# Altium PCB barricelli.PcbDoc (part 2 of 5)
Units mm, origin at the board's own origin, x right, y up, seen from the top; angles counter-clockwise.
Board outline 153 x 153 mm, 8 copper layers (Top Layer, PWR, Mid-Layer 1, Mid-Layer 2, Mid-Layer 3, Mid-Layer 4, GND, Bottom Layer); 168 components, 427 nets, 1233 pads, 911 vias.
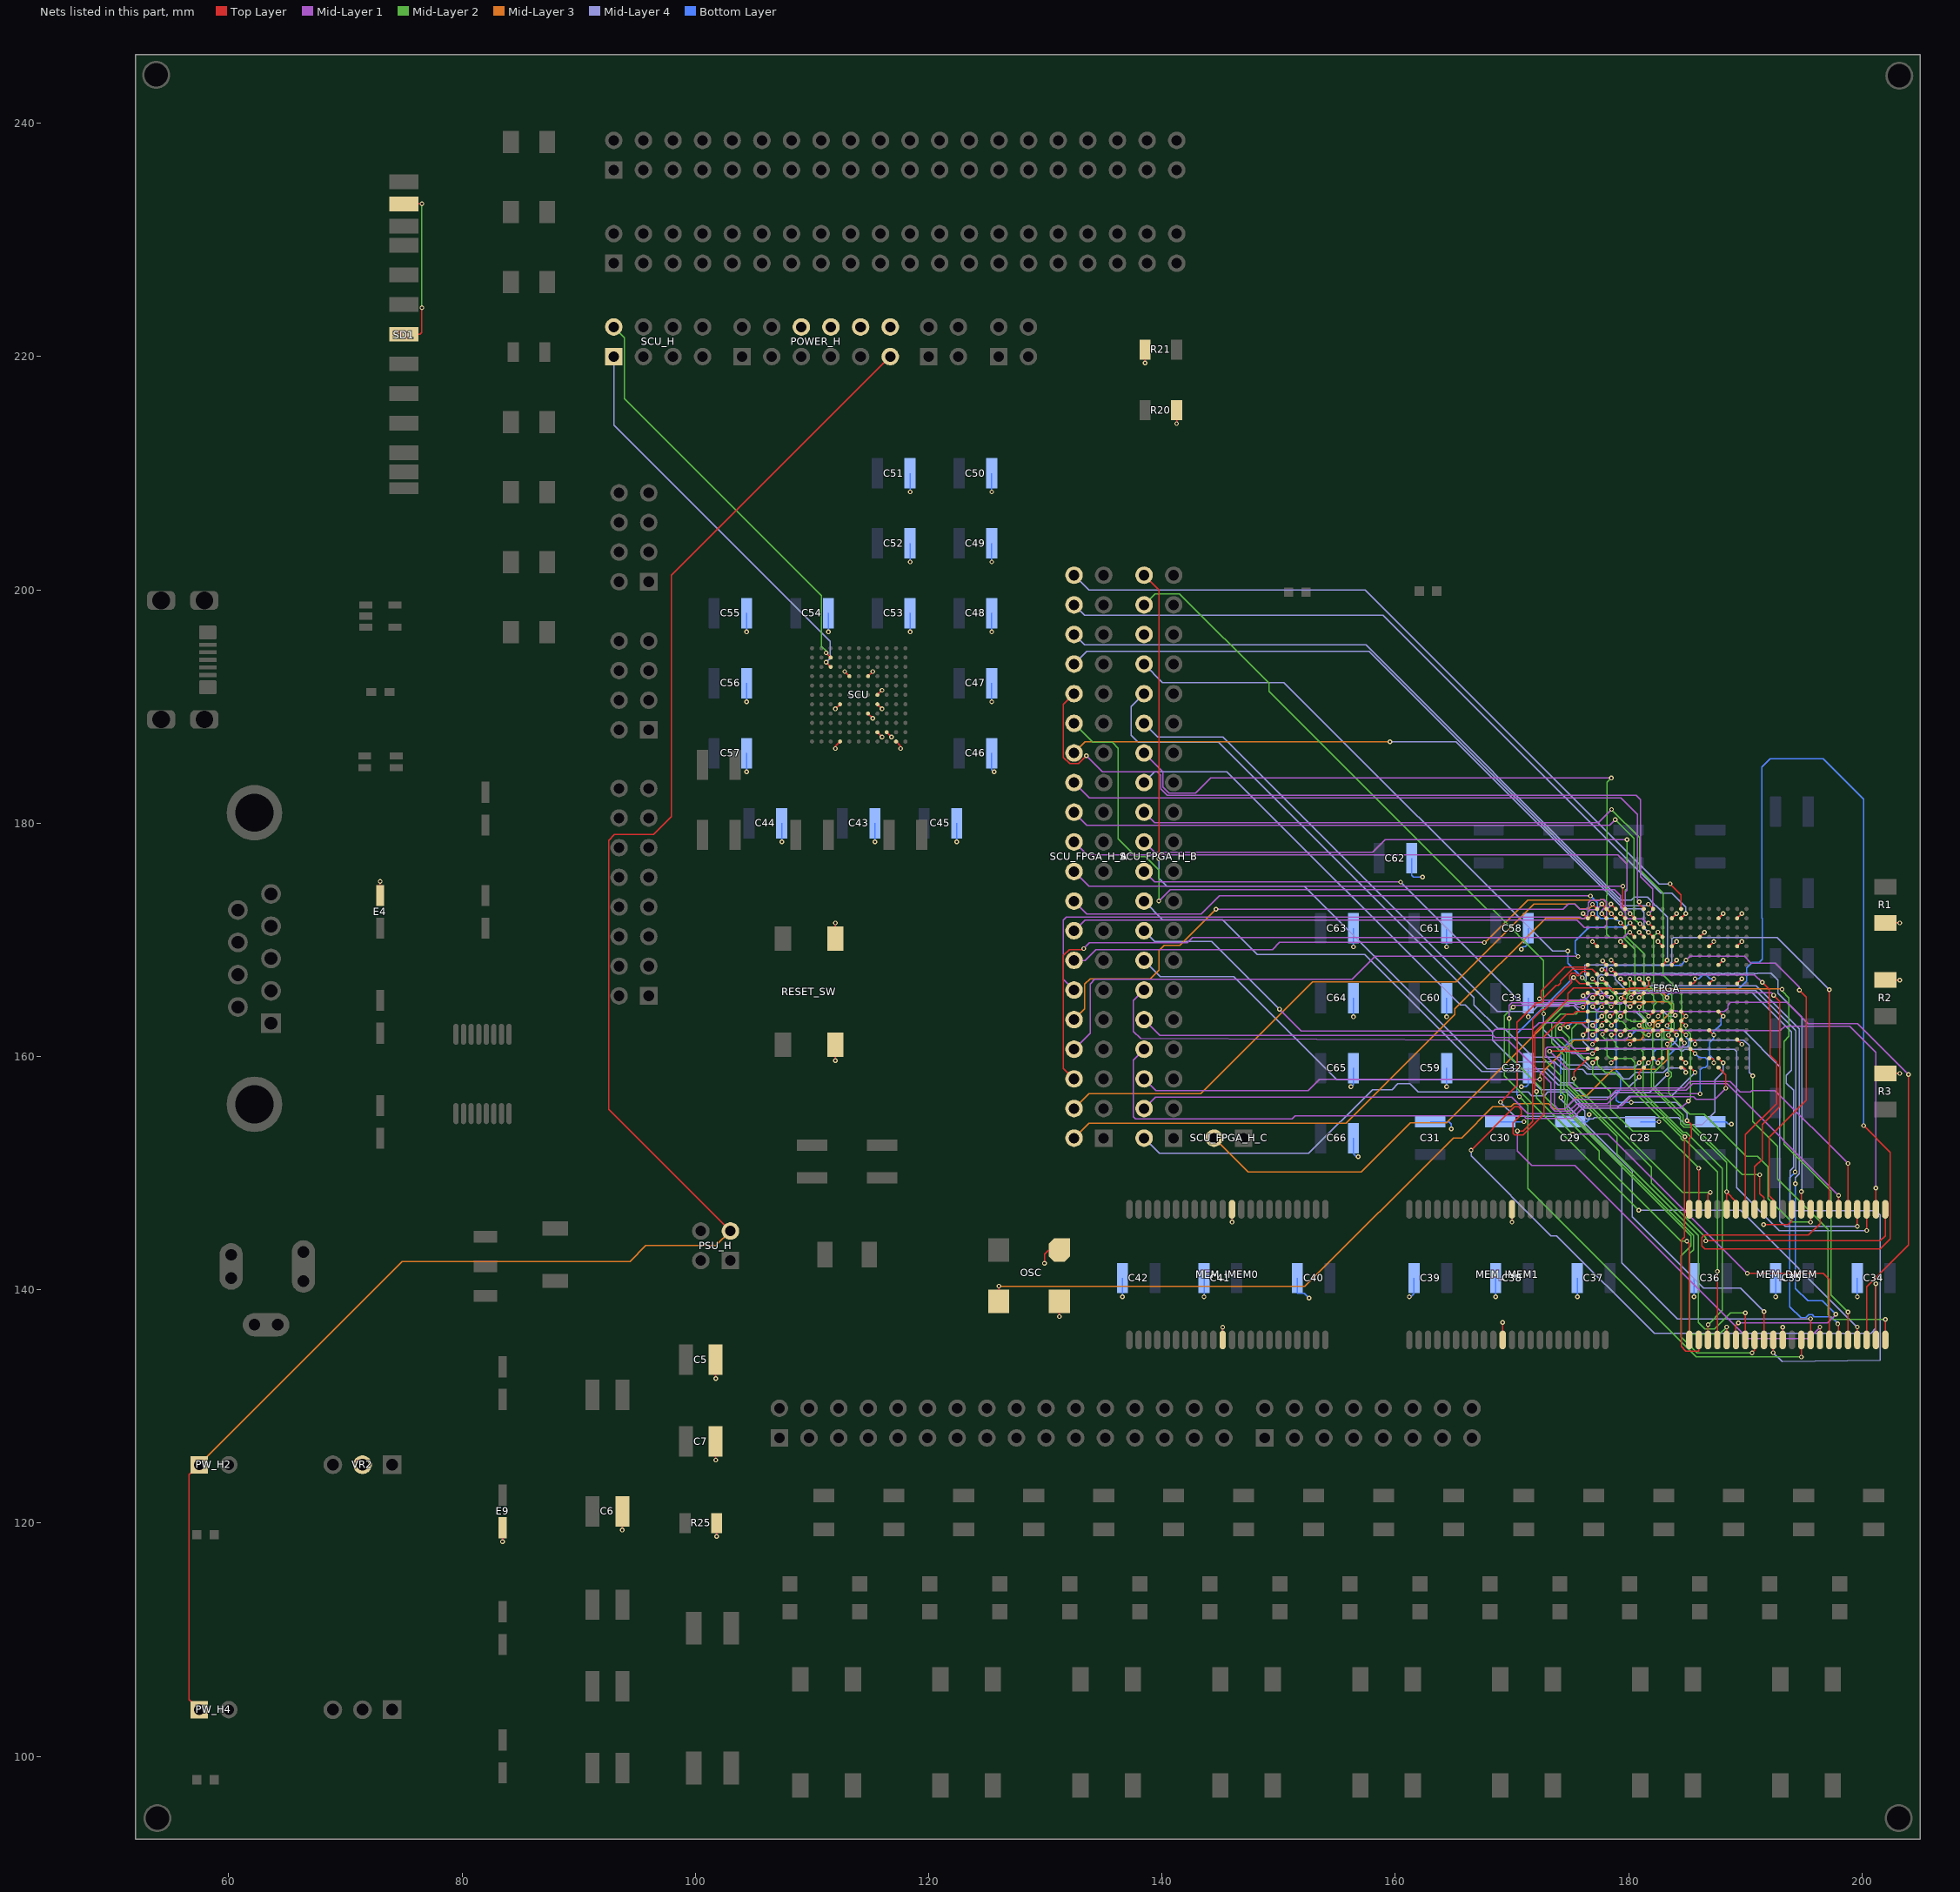
[diagram p8: the nets of this part, all layers, seen from the top]

## Via types
v1: diameter 0.4, hole 0.2, Top Layer to Bottom Layer, tented top, 896 vias
v2: diameter 0.4, hole 0.2, Top Layer to Bottom Layer, 14 vias
v3: diameter 0.6, hole 0.2, Top Layer to Bottom Layer, tented top, 1 vias

## Nets (pads, with @x,y where several pads share a name; then routed paths per layer and width w, separated by ;. In a path a pad name is that pad's centre, name@x,y a point inside that pad or via, vN(x,y) a via of type N, cw(c..) or ccw(c..) an arc to the next point about the centre after c; other vN are vias at no path point) (continued)
3.3V: C5.2 C6.2 C7.2 C27.1 C28.1 C29.1 C30.1 C31.1 C32.1 C33.1 C34.1 C35.1 C36.1 C37.1 C38.1 C39.1 C40.1 C41.1 C42.1 C43.1 C44.1 C45.1 C46.1 C47.1 C48.1 C49.1 C50.1 C51.1 C52.1 C53.1 C54.1 C55.1 C56.1 C57.1 C58.1 C59.1 C60.1 C61.1 C62.1 C63.1 C64.1 C65.1 C66.1 E4.2 E9.1 FPGA.B1 FPGA.B5 FPGA.B10 FPGA.B15 FPGA.B17 FPGA.D7 FPGA.D13 FPGA.E2 FPGA.E5 FPGA.E9 FPGA.E10 FPGA.E14 FPGA.E17 FPGA.G4 FPGA.G10 FPGA.G15 FPGA.J2 FPGA.J5 FPGA.J12 FPGA.J14 FPGA.J17 FPGA.K7 FPGA.M4 FPGA.M9 FPGA.M15 FPGA.P5 FPGA.P9 FPGA.P10 FPGA.P14 FPGA.R2 FPGA.R6 FPGA.R12 FPGA.R17 FPGA.U4 FPGA.U9 FPGA.U14 MEM_DMEM.11 MEM_DMEM.33 MEM_IMEM0.11 MEM_IMEM0.33 MEM_IMEM1.11 MEM_IMEM1.33 OSC.1 OSC.4 POWER_H.6 POWER_H.8 POWER_H.10 POWER_H.12 R1.2 R2.2 R3.2 R20.1 R21.1 R25.1 RESET_SW.3 RESET_SW.4 SCU.D5 SCU.D7 SCU.F8 SCU.G4 SCU.G8 SCU.H7 SCU.K8 SCU.K9 SCU.L4 SCU.L10 SD1.4 SD1.11 VR2.2 | length 152.9
  Top Layer w0.1: E4.2@72.975,173.8 v1(72.975,175) ; SD1.4@75,221.919 76.403,221.919 76.556,222.071 v1(76.556,224.18) ; SD1.11@75,233.095 v1(76.556,233.095) ; v1(83.46,118.4) E9.1@83.46,119.6 ; v1(93.735,119.4) C6.2@93.735,121 ; v1(101.735,125.4) C7.2@101.735,127 ; v1(101.735,132.4) C5.2@101.735,134 ; v1(101.81,118.85) R25.1@101.81,120 ; v1(112,159.65) RESET_SW.4@112,161 ; RESET_SW.3@112,170.1 v1(112,171.45) ; v1(112,186.397) 112,186.6 SCU.L4@112.4,187 ; v1(112,189.8) SCU.G4@112.4,190.2 ; v1(112.8,193) SCU.D5@113.2,192.6 ; SCU.H7@114.8,189.4 v1(115.2,189) ; SCU.D7@114.8,192.6 v1(115.2,193) ; SCU.K8@115.6,187.8 v1(116,187.4) ; SCU.G8@115.6,190.2 v1(116,189.8) ; SCU.F8@115.6,191 v1(116,191.4) ; SCU.K9@116.4,187.8 v1(116.8,187.4) ; SCU.L10@117.2,187 117.6,186.6 v1(117.6,186.397) ; v1(129.921,142.265) 129.921,143.07 130.251,143.4 OSC.1@131.2,143.4 131.2,143.916 131.6,143.916 OSC.1@131.6,143.9 ; v1(131.2,137.7) OSC.4@131.2,139 ; v1(138.55,219.45) R21.1@138.55,220.6 ; v1(141.25,214.25) R20.1@141.25,215.4 ; MEM_IMEM0.11@145.2,135.7 v1(145.2,136.8) ; v1(146,145.8) MEM_IMEM0.33@146,146.9 ; MEM_IMEM1.11@169.2,135.7 v1(169.2,137.206) ; v1(170,145.8) MEM_IMEM1.33@170,146.9 ; v1(176.1,172.25) FPGA.B1@176.5,171.85 ; v1(176.9,161.05) FPGA.R2@177.3,161.45 ; v1(176.9,166.65) FPGA.J2@177.3,166.25 ; v1(176.9,169.85) FPGA.E2@177.3,169.45 ; v1(178.399,163.45) 178.5,163.45 FPGA.M4@178.9,163.85 ; v1(178.5,159.45) FPGA.U4@178.9,159.85 ; v1(178.5,168.25) FPGA.G4@178.9,167.85 ; v1(179.3,161.85) FPGA.P5@179.7,162.25 ; v1(179.3,166.65) FPGA.J5@179.7,166.25 ; v1(179.3,169.85) FPGA.E5@179.7,169.45 ; v1(179.3,172.25) FPGA.B5@179.7,171.85 ; v1(180.1,161.05) FPGA.R6@180.5,161.45 ; v1(180.9,165.05) FPGA.K7@181.3,165.45 ; v1(180.9,170.65) FPGA.D7@181.3,170.25 ; v1(182.499,159.461) 182.499,159.715 182.634,159.85 FPGA.U9@182.9,159.85 ; v1(182.499,161.849) FPGA.P9@182.9,162.25 ; v1@182.5,163.45 FPGA.M9@182.9,163.85 ; v1(182.5,169.85) FPGA.E9@182.9,169.45 ; FPGA.P9@182.9,162.39 182.9,162.275 FPGA.P10@183.625,162.275 ; FPGA.P10@183.7,162.25 184.099,161.851 184.099,161.849 v1(184.109,161.858) ; FPGA.G10@183.7,167.85 v1(184.1,168.25) ; FPGA.E10@183.7,169.45 v1(184.1,169.85) ; FPGA.B10@183.7,171.85 v1(184.1,172.25) ; FPGA.R12@185.3,161.45 185.59,161.45 185.699,161.341 v1(185.699,161.061) ; FPGA.J12@185.3,166.25 185.529,166.25 185.699,166.421 v1(185.699,166.649) ; FPGA.D13@186.1,170.25 v1(186.5,170.65) ; FPGA.U14@186.9,159.85 187.165,159.85 187.3,159.715 v1(187.3,159.461) ; FPGA.P14@186.9,162.25 187.3,161.85 v1(187.3,161.849) ; FPGA.J14@186.9,166.25 v1(187.3,166.65) ; FPGA.E14@186.9,169.45 v1(187.3,169.85) ; FPGA.M15@187.7,163.85 v1(188.1,163.45) ; FPGA.G15@187.7,167.85 v1(188.1,168.25) ; FPGA.B15@187.7,171.85 v1(188.1,172.25) ; FPGA.R17@189.3,161.45 v1(189.7,161.05) ; FPGA.J17@189.3,166.25 v1(189.7,166.65) ; FPGA.E17@189.3,169.45 v1(189.7,169.85) ; FPGA.B17@189.3,171.85 v1(189.7,172.25) ; v1(191.562,145.597) 193.699,145.597 194,145.898 MEM_DMEM.33@194,146.9 ; MEM_DMEM.11@193.2,135.7 v1(193.2,136.8) ; R3.2@202,158.55 v1(203.25,158.55) ; R2.2@202,166.55 v1(203.25,166.55) ; R1.2@202,171.45 v1(203.25,171.45)
  Mid-Layer 2 w0.1: v1(76.556,224.18) v1(76.556,233.095)
  Bottom Layer w0.1: v1(104.4,184.4) C57.1@104.4,186 ; v1(104.4,190.4) C56.1@104.4,192 ; v1(104.4,196.4) C55.1@104.4,198 ; v1(107.4,178.4) C44.1@107.4,180 ; v1(111.4,196.4) C54.1@111.4,198 ; v1(115.4,178.4) C43.1@115.4,180 ; v1(118.4,196.4) C53.1@118.4,198 ; v1(118.4,202.4) C52.1@118.4,204 ; v1(118.4,208.4) C51.1@118.4,210 ; v1(122.4,178.4) C45.1@122.4,180 ; C46.1@125.4,186 125.4,184.603 v1(125.603,184.4) ; v1(125.4,190.4) C47.1@125.4,192 ; v1(125.4,196.4) C48.1@125.4,198 ; v1(125.4,202.4) C49.1@125.4,204 ; v1(125.4,208.4) C50.1@125.4,210 ; v1(136.6,139.4) C42.1@136.6,141 ; v1(143.6,139.4) C41.1@143.6,141 ; C40.1@151.6,141 151.6,139.7 152.197,139.7 v1(152.603,139.294) ; v1(156.197,157.4) 156.4,157.603 C65.1@156.4,159 ; C66.1@156.4,153 156.4,151.667 156.667,151.4 v1(156.806,151.4) ; v1(156.4,163.4) C64.1@156.4,165 ; v1(156.4,169.4) C63.1@156.4,171 ; v1(161.194,139.4) 161.341,139.4 161.6,139.659 C39.1@161.6,141 ; C62.1@161.4,177 161.4,175.544 161.544,175.4 162.3,175.4 v1(162.325,175.375) ; C31.1@163,154.4 164.592,154.4 164.795,154.197 v1(164.795,153.797) ; v1(164.4,157.4) C59.1@164.4,159 ; v1(164.4,163.4) C60.1@164.4,165 ; v1(164.4,169.4) C61.1@164.4,171 ; v1(168.6,139.4) C38.1@168.6,141 ; C30.1@169,154.4 170.605,154.4 170.612,154.407 v1(171.018,154.407) ; v1(170.79,157.4) 171.197,157.4 171.4,157.603 C32.1@171.4,159 ; v1(170.79,169.197) 170.994,169.4 171.128,169.4 171.4,169.672 C58.1@171.4,171 ; v1(171.4,163.4) C33.1@171.4,165 ; C29.1@175,154.4 176.378,154.4 176.606,154.629 v1(176.606,155.016) ; v1(175.6,139.4) C37.1@175.6,141 ; C28.1@181,154.4 182.594,154.4 v1(182.601,154.407) ; v1@182.5,159.475 182.149,159.826 182.149,160.394 182.354,160.599 183.344,160.599 184.099,161.354 184.099,161.849 v1(184.109,161.858) ; v1(185.6,139.4) C36.1@185.6,141 ; v1@185.725,166.675 186.017,166.675 186.342,166.999 186.632,166.999 186.981,166.65 v1(187.3,166.65) ; C27.1@187,154.4 188.366,154.4 188.563,154.203 v1(188.798,154.203) ; v1(187.3,159.461) 187.3,159.755 186.95,160.105 186.95,161.216 187.3,161.566 v1(187.3,161.849) 187.3,162.155 187.9,162.755 187.9,163.275 v1@188.1,163.475 ; v1(192.6,139.4) C35.1@192.6,141 ; v1(199.6,139.4) C34.1@199.6,141
  other v1: 182.525,163.45
12.0V: POWER_H.11 PSU_H.3 PW_H2.1 PW_H4.1 | length 166.8
  Top Layer w0.1: PW_H4.1@57.46,104 56.591,104.869 56.591,124.131 PW_H2.1@57.46,125 ; PSU_H.3@103,145.04 92.558,155.482 92.558,178.511 93.066,179.019 96.393,179.019 97.942,180.569 97.942,201.242 POWER_H.11@116.7,220
  Mid-Layer 3 w0.1: PW_H2.1@57.46,125 74.878,142.418 94.386,142.418 95.758,143.789 101.749,143.789 PSU_H.3@103,145.04
BOOT.RX: SCU.B3 SCU_H.2 | length 36
  Top Layer w0.1: v1(111.201,194.599) SCU.B3@111.6,194.2
  Mid-Layer 2 w0.1: SCU_H.2@93,222.54 93.904,221.636 93.904,216.408 110.82,199.492 110.82,195.139 111.201,194.758 v1(111.201,194.599)
BOOT.TX: SCU.C3 SCU_H.1 | length 34.6
  Top Layer w0.1: v1(111.201,193.799) SCU.C3@111.6,193.4
  Mid-Layer 4 w0.1: SCU_H.1@93,220 93,214.137 111.557,195.58 111.557,194.154 v1(111.201,193.799)
CLK: FPGA.D9 FPGA.R10 OSC.3 | length 80.6
  Top Layer w0.1: OSC.3@126,139 126,140.3 v1(126.009,140.31) ; v1(182.499,170.663) 182.499,170.651 FPGA.D9@182.9,170.25 ; v1(183.311,161.061) FPGA.R10@183.7,161.45 183.317,161.833 v1(183.409,161.833)
  Mid-Layer 2 w0.1: v1(182.499,170.663) 182.143,170.307 182.143,166.192 182.455,165.881 183.05,165.881 183.693,165.238 183.693,164.635 183.85,164.478 183.85,164.022 183.636,163.809 183.636,163.141 183.875,162.903 183.875,162.401 183.312,161.838 183.317,161.833 v1(183.409,161.833)
  Mid-Layer 3 w0.1: v1(126.009,140.31) 152.248,140.31 164.965,153.027 165.683,153.027 168.347,155.69 169.909,155.69 170.166,155.947 173.135,155.947 173.578,155.504 174.518,155.504 175.641,156.627 176.379,156.627 178.652,158.9 182.445,158.9 183.311,159.766 v1(183.311,161.061)
DATA_MEM.ADDR0: FPGA.N4 MEM_DMEM.5 | length 43.1
  Top Layer w0.1: v1(178.511,162.667) 178.517,162.667 FPGA.N4@178.9,163.05 ; v1(188.392,136.804) 188.4,136.796 MEM_DMEM.5@188.4,135.7
  Mid-Layer 2 w0.1: v1(178.511,162.667) 178.511,162.811 178.049,163.273 178.049,163.632 177.876,163.805 175.635,163.805 175.483,163.652 174.168,163.652 173.405,162.889 173.405,161.173 174.459,160.118 174.459,157.277 174.75,156.986 174.75,156.272 174.718,156.24 174.718,155.508 185.562,144.663 185.562,143.433 185.242,143.113 185.242,136.373 185.429,136.186 187.773,136.186 v1(188.392,136.804)
DATA_MEM.ADDR1: FPGA.N3 MEM_DMEM.4 | length 37
  Top Layer w0.1: v1(177.698,162.662) 177.698,162.948 FPGA.N3@178.1,163.05 ; MEM_DMEM.4@187.6,135.7 187.6,141.575 v1(187.604,141.58)
  Mid-Layer 2 w0.1: v1(177.698,162.662) 177.292,162.255 176.53,162.255 175.971,162.814 175.565,162.814 175.15,162.399 175.15,162.38 175.133,162.363 175.133,160.884 176.149,159.868 177.19,159.868 177.343,159.715 177.343,159.309 178.003,158.648 178.816,158.648 182.702,154.762 182.847,154.762 184.475,153.134 184.475,152.98 184.68,152.775 184.943,152.775 187.604,150.114 v1(187.604,141.58)
DATA_MEM.ADDR2: FPGA.P4 MEM_DMEM.3 | length 32.6
  Top Layer w0.1: v1(178.511,161.849) 178.798,161.849 178.9,161.95 FPGA.P4@178.9,162.25 ; MEM_DMEM.3@186.8,135.7 186.8,136.991 v1(186.817,137.008)
  Mid-Layer 2 w0.1: v1(178.511,161.849) 178.511,161.569 178.892,161.188 178.892,160.934 179.177,160.65 181.005,160.65 181.254,160.401 181.254,156.921 184.675,153.5 184.945,153.5 188.036,150.409 188.036,138.227 v1(186.817,137.008)
DATA_MEM.ADDR3: FPGA.P3 MEM_DMEM.2 | length 34.4
  Top Layer w0.1: v1(177.75,161.9) 177.75,161.824 177.698,161.773 177.698,161.848 FPGA.P3@178.1,162.25 ; 184.725,144.45 184.775,144.5 184.775,153.075 v1(184.825,153.125) ; 184.734,144.475 184.506,144.247 184.506,135.153 184.912,134.747 186,134.747 MEM_DMEM.2@186,135.7
  Mid-Layer 2 w0.1: v1(177.75,161.9) 177.75,161.824 177.698,161.773 178.13,161.341 178.13,160.096 178.41,159.817 180.238,159.817 180.543,159.512 180.543,157.349 184.601,153.291 184.659,153.291 v1(184.825,153.125)
DATA_MEM.ADDR4: FPGA.L6 MEM_DMEM.1 | length 46.6
  Top Layer w0.1: v1(180.112,164.262) FPGA.L6@180.5,164.65 ; v1(184.988,144.17) 185.2,143.959 MEM_DMEM.1@185.2,135.7
  Mid-Layer 1 w0.1: v1(169.748,163.271) 169.748,164.389 169.755,164.382 169.972,164.6 175.589,164.6 175.63,164.559 175.689,164.617 179.612,164.617 179.968,164.262 v1(180.112,164.262)
  Mid-Layer 2 w0.1: v1(169.748,163.271) 169.748,160.053 172.524,157.277 172.524,156.838 177.481,151.881 177.481,151.181 184.491,144.17 v1(184.988,144.17)
DATA_MEM.ADDR5: FPGA.M5 MEM_DMEM.44 | length 23.2
  Top Layer w0.1: v1(179.299,163.449) 179.299,163.459 179.689,163.85 FPGA.M5@179.7,163.85 ; v1(185.014,154.508) 185.364,154.158 185.364,153.142 185.2,152.979 MEM_DMEM.44@185.2,146.9
  Mid-Layer 4 w0.1: v1(180.213,156.058) 184.074,156.058 185.014,155.118 v1(185.014,154.508)
  Bottom Layer w0.1: v1(179.299,163.449) 178.943,163.093 178.943,158.775 179.299,158.42 179.299,157.201 178.943,156.845 178.943,156.261 179.146,156.058 v1(180.213,156.058)
DATA_MEM.ADDR6: FPGA.U2 MEM_DMEM.43 | length 18.3
  Top Layer w0.1: v1(176.911,159.461) FPGA.U2@177.3,159.85 ; MEM_DMEM.43@186,146.9 v1(186,150.423)
  Mid-Layer 2 w0.1: v1(176.911,159.461) 176.911,158.499 178.455,156.955 178.455,155.479 180.332,153.602 182.821,153.602 v1(186,150.423)
DATA_MEM.ADDR7: FPGA.U1 MEM_DMEM.42 | length 19.8
  Top Layer w0.1: v1(175.321,158.102) 175.321,158.671 FPGA.U1@176.5,159.85 ; MEM_DMEM.42@186.8,146.9 186.8,148.158 v1(187.003,148.361)
  Mid-Layer 2 w0.1: v1(175.321,158.102) 175.321,157.666 184.625,148.361 v1(187.003,148.361)
DATA_MEM.ADDR8: FPGA.T2 MEM_DMEM.28 | length 40.6
  Top Layer w0.1: v1(176.899,160.249) FPGA.T2@177.3,160.65 ; MEM_DMEM.28@198,146.9 v1(198,148.089)
  Mid-Layer 1 w0.1: v1(176.899,160.249) 175.163,160.249 174.61,160.802 173.025,160.802 172.878,160.655 172.878,160.102 173.618,159.362 173.618,155.826 173.939,155.504 174.515,155.504 175.331,156.32 178.145,156.32 178.939,157.114 184.943,157.114 185.481,157.652 188.437,157.652 v1(198,148.089)
DATA_MEM.ADDR9: FPGA.T1 MEM_DMEM.27 | length 38.1
  Top Layer w0.1: v1(173.228,160.452) 176.302,160.452 FPGA.T1@176.5,160.65 ; MEM_DMEM.27@198.8,146.9 v1(198.8,150.831)
  Mid-Layer 1 w0.1: v1(173.228,160.452) 174.854,158.826 174.854,157.683 175.26,157.277 178.451,157.277 178.488,157.314 184.738,157.314 185.276,157.852 188.697,157.852 189.574,156.975 190.461,156.975 190.576,157.09 192.541,157.09 v1(198.8,150.831)
DATA_MEM.ADDR10: FPGA.P2 MEM_DMEM.26 | length 39.7
  Top Layer w0.1: v1(176.911,161.849) 177.114,162.052 177.3,162.052 FPGA.P2@177.3,162.25 ; v1(199.6,145.44) MEM_DMEM.26@199.6,146.9
  Mid-Layer 4 w0.1: v1(176.911,161.849) 177.312,162.25 189.845,162.25 192.964,159.131 192.964,145.898 193.421,145.44 v1(199.6,145.44)
DATA_MEM.ADDR11: FPGA.P1 MEM_DMEM.25 | length 41
  Top Layer w0.1: v1(176.098,161.849) FPGA.P1@176.5,162.25 ; MEM_DMEM.25@200.4,146.9 200.4,145.091 v1(200.406,145.085)
  Mid-Layer 4 w0.1: v1(176.098,161.849) 176.098,161.29 176.784,160.604 177.559,160.604 177.605,160.65 177.895,160.65 177.941,160.604 184.368,160.604 184.497,160.475 184.643,160.475 184.767,160.599 185.057,160.599 185.067,160.588 185.083,160.604 189.078,160.604 189.255,160.426 189.255,148.751 192.921,145.085 v1(200.406,145.085)
DATA_MEM.ADDR12: FPGA.N2 MEM_DMEM.24 | length 39.6
  Top Layer w0.1: v1(176.911,162.662) FPGA.N2@177.3,163.05 ; v1(201.193,148.717) 201.2,148.71 MEM_DMEM.24@201.2,146.9
  Mid-Layer 1 w0.1: v1(176.911,162.662) 177.365,162.208 177.563,162.208 177.605,162.25 177.895,162.25 177.937,162.208 181.664,162.208 181.672,162.2 182.128,162.2 182.141,162.213 193.004,162.213 193.392,162.602 198.949,162.602 201.193,160.358 v1(201.193,148.717)
DATA_MEM.ADDR13: FPGA.N1 MEM_DMEM.23 | length 43.9
  Top Layer w0.1: v1(174.123,162.402) 174.605,162.885 176.335,162.885 FPGA.N1@176.5,163.05 ; v1(186.614,144.196) 201.574,144.196 202,144.621 MEM_DMEM.23@202,146.9
  Mid-Layer 2 w0.1: v1(174.123,162.402) 174.901,161.623 174.901,157.557 181.942,150.516 181.942,149.138 186.614,144.467 v1(186.614,144.196)
DATA_MEM.ADDR14: FPGA.M3 MEM_DMEM.22 | length 50.7
  Top Layer w0.1: v1(177.698,163.449) FPGA.M3@178.1,163.85 ; MEM_DMEM.22@202,135.7 v1(202,137.465)
  Mid-Layer 2 w0.1: v1(190.627,158.344) 190.627,154.432 192.761,152.298 192.761,149.504 197.104,145.161 197.104,137.871 197.51,137.465 v1(202,137.465)
  Mid-Layer 4 w0.1: v1(177.698,163.449) 177.267,163.017 176.682,163.017 176.561,162.896 176.561,161.493 176.654,161.4 178.056,161.4 178.098,161.442 183.693,161.442 184.328,160.807 185.115,160.807 185.318,161.011 185.318,161.214 185.522,161.417 189.865,161.417 190.348,160.934 190.348,158.623 v1(190.627,158.344)
DATA_MEM.ADDR15: FPGA.M1 MEM_DMEM.21 | length 73.3
  Top Layer w0.1: v1(166.497,151.968) 170.205,155.677 170.586,155.677 170.815,155.448 170.815,155.042 170.104,154.33 170.104,153.416 170.256,153.264 170.942,153.264 172.74,155.061 172.74,161.711 174.681,163.652 175.285,163.652 175.483,163.85 FPGA.M1@176.5,163.85 ; v1(201.193,140.525) 201.2,140.518 MEM_DMEM.21@201.2,135.7
  Mid-Layer 4 w0.1: v1(166.497,151.968) 166.497,151.481 173.348,144.63 173.835,144.63 182.194,136.271 200.762,136.271 201.193,136.703 v1(201.193,140.525)
DATA_MEM.ADDR16: FPGA.L2 MEM_DMEM.20 | length 55.1
  Top Layer w0.1: v1(176.911,164.262) FPGA.L2@177.3,164.65 ; MEM_DMEM.20@200.4,135.7 200.4,140.253 203.987,143.84 v1(203.987,158.445)
  Mid-Layer 1 w0.1: v1(176.911,164.262) 177.317,163.855 183.785,163.855 183.855,163.925 183.93,163.925 183.955,163.9 184.17,163.9 184.215,163.855 188.214,163.855 188.493,164.135 188.493,164.389 188.747,164.643 193.532,164.643 195.373,162.802 199.631,162.802 v1(203.987,158.445)
DATA_MEM.ADDR17: FPGA.L1 MEM_DMEM.19 | length 53.2
  Top Layer w0.1: v1(176.073,164.236) 176.086,164.236 FPGA.L1@176.5,164.65 ; MEM_DMEM.19@199.6,135.7 v1(199.6,136.804)
  Mid-Layer 1 w0.1: v1(170.104,164.236) 170.267,164.4 175.506,164.4 175.67,164.236 v1(176.073,164.236)
  Mid-Layer 2 w0.1: v1(170.104,164.236) 169.356,163.489 169.356,158.329 v1(180.873,146.812)
  Mid-Layer 4 w0.1: v1(180.873,146.812) 189.592,146.812 v1(199.6,136.804)
DATA_MEM.ADDR18: FPGA.K2 MEM_DMEM.18 | length 50
  Top Layer w0.1: v1(176.911,165.049) 177.114,165.252 177.3,165.252 FPGA.K2@177.3,165.45 ; MEM_DMEM.18@198.8,135.7 v1(198.8,138.1)
  Mid-Layer 2 w0.1: v1(193.156,165.76) 193.156,165.605 193.746,165.015 193.746,161.721 193.319,161.295 193.319,152.498 197.358,148.459 197.358,139.542 v1(198.8,138.1)
  Mid-Layer 3 w0.1: v1(176.911,165.049) 177.662,165.8 193.116,165.8 v1(193.156,165.76)
DATA_MEM.BUS0: FPGA.K1 MEM_DMEM.7 | length 43.7
  Top Layer w0.1: v1(176.098,165.202) 176.098,165.405 FPGA.K1@176.5,165.45 ; v1(189.992,138.024) 190,138.016 MEM_DMEM.7@190,135.7
  Mid-Layer 2 w0.1: v1(174.8,162.525) 174.742,162.525 174.676,162.458 174.092,162.89 173.761,162.56 173.761,161.671 174.676,160.757 174.676,157.48 178.994,153.162 178.994,151.638 185.979,144.653 185.979,137.211 186.538,136.652 187.35,136.652 188.722,138.024 v1(189.992,138.024)
  Bottom Layer w0.1: v1(174.8,162.525) 174.742,162.525 175.158,162.941 176.225,162.941 176.454,163.17 176.454,164.846 v1(176.098,165.202)
DATA_MEM.BUS1: FPGA.L4 MEM_DMEM.8 | length 47.6
  Top Layer w0.1: v1(178.5,164.25) 178.5,164.248 178.511,164.236 178.74,164.465 FPGA.L4@178.9,164.65 ; v1(190.576,134.595) 190.8,134.818 MEM_DMEM.8@190.8,135.7
  Mid-Layer 2 w0.1: v1(178.5,164.25) 178.5,164.248 178.054,164.694 174.739,164.694 172.678,162.633 172.678,159.884 174.168,158.394 174.168,156.956 174.274,156.85 174.345,156.85 174.55,156.645 174.55,156.355 174.518,156.323 174.518,155.425 185.338,144.604 185.338,143.745 184.48,142.887 184.48,135.966 185.852,134.595 v1(190.576,134.595)
DATA_MEM.BUS2: FPGA.L3 MEM_DMEM.9 | length 41.3
  Top Layer w0.1: v1(177.7,164.25) 177.627,164.25 177.615,164.262 178.003,164.65 FPGA.L3@178.1,164.65 ; MEM_DMEM.9@191.6,135.7 v1(191.6,138.143)
  Mid-Layer 4 w0.1: v1(174.2,156.5) 174.2,156.41 174.168,156.378 180.323,150.222 180.323,146.262 186.429,140.156 189.587,140.156 v1(191.6,138.143)
  Bottom Layer w0.1: v1(174.2,156.5) 174.2,156.41 174.168,156.378 174.168,160.503 175.133,161.468 177.089,161.468 177.267,161.646 177.267,163.913 177.615,164.262 177.627,164.25 v1(177.7,164.25)
DATA_MEM.BUS3: FPGA.J3 MEM_DMEM.10 | length 65.3
  Top Layer w0.1: v1(177.7,166.65) 177.725,166.625 177.725,166.648 177.724,166.649 177.724,166.626 FPGA.J3@178.1,166.25 ; v1(192.4,134.605) MEM_DMEM.10@192.4,135.7
  Mid-Layer 4 w0.1: v1(177.7,166.65) 177.725,166.625 177.725,166.648 178.973,165.4 181.765,165.4 181.815,165.45 190.607,165.45 193.954,162.103 193.954,158.826 193.523,158.394 193.523,157.703 194.127,157.099 194.127,150.495 193.853,150.221 193.853,147.193 194.259,146.787 201.168,146.787 201.549,146.406 201.549,133.96 193.172,133.833 v1(192.4,134.605)
DATA_MEM.BUS4: FPGA.J1 MEM_DMEM.13 | length 52.8
  Top Layer w0.1: v1(175.271,166.775) 175.796,166.25 FPGA.J1@176.5,166.25 ; v1(194.8,134.239) MEM_DMEM.13@194.8,135.7
  Mid-Layer 2 w0.1: v1(170.637,156.54) 171.374,155.804 171.374,148.666 185.801,134.239 v1(194.8,134.239)
  Bottom Layer w0.1: v1(170.637,156.54) 170.44,156.737 170.44,161.945 v1(175.271,166.775)
DATA_MEM.BUS5: FPGA.H2 MEM_DMEM.14 | length 57.5
  Top Layer w0.1: v1(169.012,156.083) 170.44,157.512 170.44,162.935 172.105,164.6 172.495,164.6 172.7,164.805 172.7,165 173.796,166.096 173.957,166.096 174.162,166.301 174.162,166.462 175.175,167.475 176.875,167.475 FPGA.H2@177.3,167.05 ; MEM_DMEM.14@195.6,135.7 v1(195.6,137.516)
  Mid-Layer 4 w0.1: v1(169.012,156.083) 170.231,154.864 175.16,154.864 179.4,150.624 179.4,142.316 184.201,137.516 v1(195.6,137.516)
DATA_MEM.BUS6: FPGA.H1 MEM_DMEM.15 | length 53.5
  Top Layer w0.1: v1(170.459,153.619) 170.931,153.619 171.755,154.443 171.755,163.182 172.575,164.002 172.777,164.002 175.126,166.351 175.126,166.425 174.921,166.63 174.921,166.92 175.126,167.125 175.416,167.125 175.621,166.92 175.695,166.92 176.05,167.275 176.275,167.275 FPGA.H1@176.5,167.05 ; MEM_DMEM.15@196.4,135.7 v1(196.4,136.804)
  Mid-Layer 1 w0.1: v1(170.459,153.619) 170.459,151.893 171.699,150.653 175.381,150.653 190.221,135.814 195.409,135.814 v1(196.4,136.804)
DATA_MEM.BUS7: FPGA.K4 MEM_DMEM.16 | length 51.4
  Top Layer w0.1: v1(172.11,156.997) 171.958,157.15 171.958,162.077 174.777,164.897 174.777,165.405 175.26,165.887 178.463,165.887 FPGA.K4@178.9,165.45 ; v1(190.17,141.402) 196.692,141.402 197.2,140.894 MEM_DMEM.16@197.2,135.7
  Mid-Layer 1 w0.1: v1(175.209,153.34) 178.232,153.34 v1(190.17,141.402)
  Mid-Layer 2 w0.1: v1(172.11,156.997) 172.11,156.439 v1(175.209,153.34)
DATA_MEM.BUS8: FPGA.K3 MEM_DMEM.29 | length 47.8
  Top Layer w0.1: v1(177.699,165.049) FPGA.K3@178.1,165.45 ; MEM_DMEM.29@197.2,146.9 197.2,165.729 v1(197.206,165.735)
  Mid-Layer 4 w0.1: 177.35,165.398 v1(177.699,165.049) ; 177.35,165.4 176.372,166.378 176.372,166.896 176.243,167.025 176.243,167.843 183.464,167.843 183.718,168.097 183.718,170.078 183.845,170.205 192.735,170.205 v1(197.206,165.735)
DATA_MEM.BUS9: FPGA.L5 MEM_DMEM.30 | length 110.2
  Top Layer w0.1: v1(179.35,165) 179.35,165.024 179.375,165.049 179.548,165.049 179.7,164.897 FPGA.L5@179.7,164.65 ; MEM_DMEM.30@196.4,146.9 196.4,145.676 195.402,144.678 186.461,144.678 186.258,144.475 186.258,143.764 186.538,143.485 201.574,143.485 202.438,144.348 202.438,151.79 v1(200.152,154.076)
  Mid-Layer 3 w0.1: v1(179.35,165) 179.35,165.024 179.756,165.43 182.956,165.43 183.336,165.05 v1(183.3,165.05)
  Bottom Layer w0.1: v1(183.3,165.05) v1@183.336,165.05 ; v1@183.337,165.049 183.337,165.252 183.935,165.85 188.361,165.85 188.399,165.811 189.459,165.811 190.119,166.472 190.119,167.589 190.602,168.072 191.211,168.072 191.465,168.326 191.465,171.838 191.414,171.888 191.414,184.81 192.126,185.522 196.672,185.522 200.152,182.042 v1(200.152,154.076)
DATA_MEM.BUS10: FPGA.K5 MEM_DMEM.31 | length 34.4
  Top Layer w0.1: FPGA.K5@179.7,165.45 180.112,165.862 181.483,165.862 181.712,166.091 181.712,166.638 v1(181.7,166.65) ; v1(195.6,145.796) MEM_DMEM.31@195.6,146.9
  Mid-Layer 2 w0.1: v1(181.7,166.65) 181.712,166.638 181.712,166.116 182.296,165.532 182.575,165.532 182.95,165.157 182.95,164.905 183.155,164.7 183.407,164.7 183.45,164.657 183.45,164.595 183.65,164.395 183.65,164.105 183.436,163.891 183.436,163.059 183.675,162.82 183.675,162.484 183.379,162.188 183.167,162.188 183.049,162.07 183.049,161.621 183.042,161.613 183.172,161.483 183.385,161.483 183.661,161.206 183.661,160.916 183.45,160.705 183.45,158.802 183.662,158.59 183.662,158.3 183.45,158.088 183.45,156.839 185.23,155.058 186.472,155.058 190.09,151.44 191.03,151.44 191.939,150.532 191.939,147.837 193.98,145.796 v1(195.6,145.796)
DATA_MEM.BUS11: FPGA.H4 MEM_DMEM.32 | length 36.1
  Top Layer w0.1: v1@178.5,167.451 178.511,167.462 178.714,167.259 178.9,167.259 FPGA.H4@178.9,167.05 ; MEM_DMEM.32@194.8,146.9 v1(194.8,148.412)
  Mid-Layer 4 w0.1: v1@178.5,167.451 178.511,167.462 178.861,167.112 179.444,167.112 179.456,167.125 179.93,167.125 179.955,167.1 180.245,167.1 180.27,167.125 180.73,167.125 180.754,167.101 181.044,167.101 181.068,167.125 181.53,167.125 181.555,167.1 181.845,167.1 181.87,167.125 182.33,167.125 182.355,167.1 182.645,167.1 182.67,167.125 183.93,167.125 183.955,167.1 184.245,167.1 184.27,167.125 184.73,167.125 184.755,167.1 185.045,167.1 185.07,167.125 185.542,167.125 185.554,167.112 185.844,167.112 185.857,167.125 186.33,167.125 186.355,167.1 186.645,167.1 186.67,167.125 187.142,167.125 187.155,167.112 187.445,167.112 187.457,167.125 187.93,167.125 187.955,167.1 188.245,167.1 188.27,167.125 188.742,167.125 188.755,167.112 189.045,167.112 189.058,167.125 189.53,167.125 189.555,167.1 189.845,167.1 189.87,167.125 190.749,167.125 190.761,167.112 191.051,167.112 191.064,167.125 192.206,167.125 192.804,166.527 192.804,165.409 194.85,163.363 194.85,148.462 v1(194.8,148.412)
  other v1: 178.5,167.45
DATA_MEM.BUS12: FPGA.H3 MEM_DMEM.35 | length 40.1
  Top Layer w0.1: v1@177.65,167.425 177.65,167.45 177.675,167.475 177.688,167.462 177.871,167.462 178.1,167.234 FPGA.H3@178.1,167.05 ; MEM_DMEM.35@192.4,146.9 192.4,147.717 192.055,148.062 192.055,153.091 195.225,156.261 195.225,165.099 v1(194.64,165.684)
  Mid-Layer 1 w0.1: v1(184.912,168.25) 185.268,168.605 189.916,168.605 190.506,168.015 192.577,168.015 194.64,165.952 v1(194.64,165.684)
  Bottom Layer w0.1: v1@177.65,167.425 177.65,167.45 177.675,167.475 177.736,167.475 177.749,167.462 178.105,167.818 184.48,167.818 v1(184.912,168.25)
  other v1: 177.7,167.45
DATA_MEM.BUS13: FPGA.L7 MEM_DMEM.36 | length 24.7
  Top Layer w0.1: v1(180.899,164.249) FPGA.L7@181.3,164.65 ; v1(191.234,149.862) 191.234,148.253 191.6,147.887 MEM_DMEM.36@191.6,146.9
  Mid-Layer 2 w0.1: v1(180.899,164.249) 180.899,163.767 181.5,163.166 181.5,162.944 181.459,162.903 181.459,162.613 181.664,162.408 181.954,162.408 181.96,162.415 182.149,162.226 182.617,162.226 182.849,161.994 182.849,161.704 182.842,161.696 182.842,161.203 182.85,161.195 182.85,159.317 182.15,158.617 182.15,157.456 184.664,154.942 184.664,154.305 184.81,154.158 185.448,154.158 189.744,149.862 v1(191.234,149.862)
DATA_MEM.BUS14: FPGA.K6 MEM_DMEM.37 | length 32.5
  Top Layer w0.1: v1(180.213,165.049) 180.213,165.163 FPGA.K6@180.5,165.45 ; MEM_DMEM.37@190.8,146.9 190.8,150.541 191.46,151.201 191.46,154.172 192.964,155.677 192.964,164.719 v1(192.43,165.252)
  Mid-Layer 1 w0.1: v1(180.213,165.049) 180.614,165.45 192.233,165.45 v1(192.43,165.252)
DATA_MEM.BUS15: FPGA.G3 MEM_DMEM.38 | length 36.4
  Top Layer w0.1: v1(177.775,168.199) 177.775,168.175 FPGA.G3@178.1,167.85 ; MEM_DMEM.38@190,146.9 190,153.295 192.669,155.964 192.669,159.55 192.139,160.08 192.139,164.043 192.06,164.123 192.06,165.75 v1(191.456,166.354)
  Mid-Layer 1 w0.1: v1(177.775,168.199) 178.105,167.869 178.105,167.234 178.333,167.005 190.805,167.005 v1(191.456,166.354)
DATA_MEM.ENABLE: FPGA.J7 MEM_DMEM.6 | length 53.2
  Top Layer w0.1: v1(180.899,166.649) 180.901,166.649 FPGA.J7@181.3,166.25 ; MEM_DMEM.6@189.2,135.7 189.2,136.957 v1(189.403,137.16)
  Mid-Layer 1 w0.1: v1(189.403,137.16) 197.06,137.16 v2@197.775,137.875
  Mid-Layer 4 w0.1: v1@180.875,166.675 181.475,166.075 190.925,166.075 194.629,162.371 194.629,149.934 194.3,149.605 v2(194.3,149.1)
  Bottom Layer w0.1: v2@194.3,149.175 v2(194.3,149.1) 194.3,140.113 195.363,139.05 196.6,139.05 v2(197.75,137.9)
DATA_MEM.LBUB: FPGA.J6 MEM_DMEM.39 MEM_DMEM.40 | length 27
  Top Layer w0.1: v2(180.1,166.65) FPGA.J6@180.475,166.275 ; v1@188.35,148.425 v1@188.4,148.375 ; MEM_DMEM.40@188.4,146.9 v1@188.4,148.375 ; MEM_DMEM.39@189.2,146.9 189.2,147.575 v1@188.4,148.375
  Mid-Layer 2 w0.1: v2@180.075,166.6 180.075,165.406 179.863,165.194 179.863,165.025 179.75,164.912 179.75,163.305 179.955,163.1 180.145,163.1 180.233,163.012 181.044,163.012 181.249,162.807 181.249,162.54 181.59,162.199 181.857,162.199 182.062,161.994 182.062,160.905 182.05,160.893 182.05,160.225 182.05,159.305 181.939,159.194 181.939,157.361 184.464,154.836 184.464,154.222 184.728,153.958 185.353,153.958 188.4,150.911 v1(188.4,148.406)
DATA_MEM.WRITE: FPGA.G1 MEM_DMEM.17 | length 63.9
  Top Layer w0.1: v2(172.35,164.95) 172.5,165.1 172.5,165.629 174.546,167.675 176.375,167.675 FPGA.G1@176.5,167.8 ; v1(197.925,137.075) 197.875,137.075 198,136.95 MEM_DMEM.17@198,135.7
  Mid-Layer 1 w0.1: v2@172.475,164.825 175.841,164.825 175.91,164.894 175.953,164.852 176.243,164.852 176.561,165.169 176.561,165.194 176.766,165.399 177.844,165.399 178.193,165.05 v2(178.525,165.05)
  Mid-Layer 4 w0.1: v2(178.525,165.05) 178.381,165.194 178.049,165.194 177.35,165.893 177.35,166.795 177.58,167.025 177.675,167.025 177.7,167 178.645,167 178.85,166.795 178.85,166.605 179.805,165.65 190.884,165.65 194.327,162.208 ; v1(194.275,150.1) 194.327,150.152 194.327,157.233 194.325,157.235 194.325,162.2
  Bottom Layer w0.1: v1@194.275,150.075 193.825,149.625 193.825,138.55 194.767,137.608 195.197,137.608 195.455,137.866 195.745,137.866 195.911,137.7 197.35,137.7 v1@197.9,137.15
FPGA.ADDR0: FPGA.B2 SCU_FPGA_H_A.2 | length 53.2
  Top Layer w0.1: v1(176.913,172.237) FPGA.B2@177.3,171.85
  Mid-Layer 3 w0.1: SCU_FPGA_H_A.2@132.46,153 133.74,154.28 155.778,154.28 165.106,163.607 165.106,164.078 172.884,171.856 176.532,171.856 v1(176.913,172.237)
FPGA.ADDR1: FPGA.A2 SCU_FPGA_H_A.4 | length 52.7
  Top Layer w0.1: v1(176.9,173.05) 176.9,172.985 176.911,172.974 176.976,172.974 FPGA.A2@177.3,172.65
  Mid-Layer 3 w0.1: SCU_FPGA_H_A.4@132.46,155.54 133.74,156.82 143.332,156.82 152.908,166.395 165.202,166.395 171.878,173.072 175.37,173.072 175.798,172.644 176.581,172.644 176.911,172.974 176.9,172.985 v1(176.9,173.05)
FPGA.ADDR2: FPGA.D6 SCU_FPGA_H_A.6 | length 61.4
  Top Layer w0.1: SCU_FPGA_H_A.6@132.46,158.08 131.547,158.993 131.547,168.656 132.055,169.164 133.189,169.164 133.275,169.25 v1(133.3,169.25) ; v1(180.1,170.65) 180.1,170.727 180.111,170.739 180.111,170.639 FPGA.D6@180.5,170.25
  Mid-Layer 1 w0.1: v1(133.3,169.25) 133.25,169.2 133.208,169.2 133.756,169.748 142.164,169.748 142.621,170.205 179.578,170.205 180.1,170.727 v1(180.1,170.65)
FPGA.ADDR3: FPGA.C6 SCU_FPGA_H_A.8 | length 56.3
  Top Layer w0.1: v1(180.111,171.45) 180.315,171.247 FPGA.C6@180.5,171.05
  Mid-Layer 1 w0.1: SCU_FPGA_H_A.8@132.46,160.62 133.833,161.993 133.833,166.218 134.239,166.624 156.312,166.624 158.267,168.58 v1(175.666,168.58)
  Bottom Layer w0.1: v1(175.666,168.58) 175.407,168.839 175.407,169.896 176.606,171.094 179.756,171.094 v1(180.111,171.45)
FPGA.ADDR4: FPGA.B3 SCU_FPGA_H_A.10 | length 54.6
  Top Layer w0.1: v1(177.698,172.237) 177.713,172.237 FPGA.B3@178.1,171.85
  Mid-Layer 1 w0.1: v1(144.628,172.618) 174.372,172.618 174.826,173.072 175.376,173.072 175.829,172.618 176.403,172.618 176.555,172.771 176.555,172.875 176.55,172.88 176.55,173.195 176.755,173.4 177.045,173.4 177.07,173.375 177.505,173.375 177.555,173.425 177.908,173.425 178.125,173.208 178.125,172.943 177.698,172.517 v1(177.698,172.237)
  Mid-Layer 3 w0.1: SCU_FPGA_H_A.10@132.46,163.16 133.375,164.075 133.375,166.218 133.833,166.675 138.989,166.675 139.725,167.411 139.725,169.062 140.183,169.52 141.529,169.52 v1(144.628,172.618)
FPGA.ADDR5: FPGA.A3 SCU_FPGA_H_A.12 | length 54
  Top Layer w0.1: v1(177.7,173.075) 177.7,173.026 177.698,173.025 177.725,173.025 FPGA.A3@178.1,172.65
  Mid-Layer 1 w0.1: SCU_FPGA_H_A.12@132.46,165.7 131.547,166.613 131.547,171.704 131.801,171.958 175.819,171.958 175.971,171.806 176.174,171.806 176.505,172.136 176.505,172.415 176.682,172.593 177.267,172.593 177.7,173.026 v1(177.7,173.075)
FPGA.ADDR6: FPGA.B4 SCU_FPGA_H_A.14 | length 49.7
  Top Layer w0.1: v1(178.511,172.237) 178.513,172.237 FPGA.B4@178.9,171.85
  Mid-Layer 1 w0.1: SCU_FPGA_H_A.14@132.46,168.24 133.391,168.24 134.315,169.164 149.454,169.164 150.063,169.774 167.716,169.774 167.715,169.775 v1(167.625,169.775)
  Mid-Layer 3 w0.1: v1(167.625,169.775) 167.715,169.775 167.716,169.774 171.354,173.411 177.541,173.411 177.555,173.425 177.845,173.425 178.054,173.216 178.054,172.695 v1(178.511,172.237)
FPGA.ADDR7: FPGA.A4 SCU_FPGA_H_A.16 | length 49
  Top Layer w0.1: v1(178.475,173.075) 178.475,173.035 178.511,172.998 178.551,172.998 FPGA.A4@178.9,172.65
  Mid-Layer 1 w0.1: SCU_FPGA_H_A.16@132.46,170.78 133.384,171.704 175.579,171.704 176.214,171.069 177.876,171.069 178.105,171.298 178.105,172.592 178.511,172.998 178.475,173.035 v1(178.475,173.075)
FPGA.ADDR8: FPGA.C5 SCU_FPGA_H_A.18 | length 50.1
  Top Layer w0.1: v1(179.3,171.45) FPGA.C5@179.7,171.05
  Mid-Layer 1 w0.1: SCU_FPGA_H_A.18@132.46,173.32 133.568,172.212 143.358,172.212 144.907,173.761 v1(176.733,173.761)
  Bottom Layer w0.1: v1(176.733,173.761) 177.317,173.177 177.317,172.11 177.571,171.856 178.894,171.856 v1(179.3,171.45)
FPGA.ADDR9: FPGA.A5 SCU_FPGA_H_A.20 | length 49.6
  Top Layer w0.1: v1(179.502,174.6) 179.502,172.848 FPGA.A5@179.7,172.65
  Mid-Layer 1 w0.1: SCU_FPGA_H_A.20@132.46,175.86 133.72,174.6 v1(179.502,174.6)
FPGA.ADDR10: FPGA.B6 SCU_FPGA_H_A.22 | length 53.2
  Top Layer w0.1: v1(180.111,172.237) FPGA.B6@180.5,171.85
  Mid-Layer 1 w0.1: SCU_FPGA_H_A.22@132.46,178.4 133.574,177.286 179.076,177.286 179.852,176.51 179.852,174.25 179.724,174.121 179.724,172.695 180.111,172.307 v1(180.111,172.237)
FPGA.ADDR11: FPGA.C7 SCU_FPGA_H_A.24 | length 57.5
  Top Layer w0.1: v1(180.975,171.375) 180.9,171.375 180.899,171.374 v1(180.975,171.375) FPGA.C7@181.3,171.05
  Mid-Layer 1 w0.1: SCU_FPGA_H_A.24@132.46,180.94 133.568,179.832 178.359,179.832 v1(178.841,180.315)
  Mid-Layer 2 w0.1: v1(178.841,180.315) 180.467,178.689 180.467,171.806 180.899,171.374 180.9,171.375 v1(180.975,171.375)
FPGA.ADDR12: FPGA.A7 SCU_FPGA_H_A.26 | length 57.8
  Top Layer w0.1: v1(180.899,173.253) 180.899,173.051 FPGA.A7@181.3,172.65
  Mid-Layer 1 w0.1: SCU_FPGA_H_A.26@132.46,183.48 133.765,182.175 179.335,182.175 180.772,180.738 180.772,173.38 v1(180.899,173.253)
FPGA.ADDR13: FPGA.D8 SCU_FPGA_H_A.28 | length 57.8
  Top Layer w0.1: v1@181.686,170.663 v1(181.7,170.65) ; v1@181.687,170.663 FPGA.D8@182.1,170.25
  Mid-Layer 3 w0.1: SCU_FPGA_H_A.28@132.46,186.02 133.409,186.969 v1(159.537,186.969)
  Mid-Layer 4 w0.1: v1(159.537,186.969) 165.22,186.969 179.546,172.644 181.051,172.644 181.325,172.37 181.325,171.23 181.254,171.159 181.254,171.094 v1(181.7,170.65)
FPGA.ADDR14: FPGA.C8 SCU_FPGA_H_A.30 | length 64.6
  Top Layer w0.1: v1(181.7,171.45) FPGA.C8@182.1,171.05
  Mid-Layer 1 w0.1: v1(139.725,173.33) 140.715,174.319 178.766,174.319 179.299,173.787 179.299,172.771 179.756,172.314 179.756,172.009 179.953,171.812 181.162,171.812 181.524,171.45 v1(181.7,171.45)
  Mid-Layer 2 w0.1: SCU_FPGA_H_A.30@132.46,188.56 134.087,186.933 135.738,186.933 136.246,186.425 136.246,178.664 137.77,177.14 138.582,177.14 139.725,175.997 v1(139.725,173.33)
FPGA.ADDR15: FPGA.B8 SCU_FPGA_H_A.32 | length 68.9
  Top Layer w0.1: SCU_FPGA_H_A.32@132.46,191.1 131.547,190.187 131.547,185.649 132.08,185.115 132.842,185.115 v1(133.502,185.776) ; v1(181.712,172.238) FPGA.B8@182.1,171.85
  Mid-Layer 1 w0.1: v1(133.502,185.776) 134.874,184.404 139.598,184.404 139.878,184.125 139.878,182.956 140.459,182.375 180.642,182.375 181,182.016 181,175.438 182.067,174.371 182.067,172.594 v1(181.712,172.238)
FPGA.ADDR16: FPGA.A8 SCU_FPGA_H_A.34 | length 59.4
  Top Layer w0.1: v1(181.7,173.05) FPGA.A8@182.1,172.65
  Mid-Layer 4 w0.1: SCU_FPGA_H_A.34@132.46,193.64 133.56,194.74 157.732,194.74 179.569,172.903 181.553,172.903 v1(181.7,173.05)
FPGA.ADDR17: FPGA.G9 SCU_FPGA_H_A.36 | length 65.4
  Top Layer w0.1: FPGA.G9@182.9,167.85 v1(183.3,168.25)
  Mid-Layer 4 w0.1: SCU_FPGA_H_A.36@132.46,196.18 133.365,195.275 157.48,195.275 179.349,173.406 180.238,173.406 180.493,173.661 181.609,173.661 182.183,173.087 182.183,173.025 182.304,172.903 182.367,172.903 183.312,171.958 183.312,168.262 v1(183.3,168.25)
FPGA.ADDR18: FPGA.B11 SCU_FPGA_H_A.38 | length 64.3
  Top Layer w0.1: FPGA.B11@184.5,171.85 v1@184.912,172.262 ; v1(184.9,172.25) v1@184.912,172.263
  Mid-Layer 4 w0.1: SCU_FPGA_H_A.38@132.46,198.72 133.365,197.815 158.953,197.815 182.751,174.017 183.686,174.017 184.912,172.791 184.912,172.262 v1(184.9,172.25)
FPGA.BUS0: FPGA.U15 SCU_FPGA_H_B.2 | length 59.6
  Top Layer w0.1: FPGA.U15@187.7,159.85 v1@188.113,159.437
  Mid-Layer 4 w0.1: SCU_FPGA_H_B.2@138.46,153 139.771,151.689 152.578,151.689 158.039,157.15 159.715,157.15 160.223,157.658 161.239,157.658 161.95,156.947 171.399,156.947 171.704,156.642 172.771,156.642 173.081,156.952 174.636,156.952 176.251,155.338 176.251,154.788 176.378,154.661 176.962,154.661 177.063,154.762 184.263,154.762 184.867,154.158 186.315,154.158 187.401,155.245 187.401,157.963 188.113,158.675 v1@188.113,159.437
  other v1: 188.1,159.45
FPGA.BUS1: FPGA.V15 SCU_FPGA_H_B.4 | length 53.9
  Top Layer w0.1: FPGA.V15@187.7,159.05 188.316,158.434 v1(188.316,157.277)
  Mid-Layer 1 w0.1: SCU_FPGA_H_B.4@138.46,155.54 139.435,156.515 169.963,156.515 171.373,155.104 175.115,155.104 175.78,155.769 179.429,155.769 180.205,156.546 185.578,156.546 185.781,156.343 187.381,156.343 v1(188.316,157.277)
FPGA.BUS2: FPGA.M11 SCU_FPGA_H_B.6 | length 50.8
  Top Layer w0.1: FPGA.M11@184.5,163.85 184.901,163.449 v1(184.912,163.449)
  Mid-Layer 1 w0.1: SCU_FPGA_H_B.6@138.46,158.08 139.466,157.074 152.527,157.074 153.492,158.039 v1(172.39,158.039)
  Mid-Layer 3 w0.1: v1(172.39,158.039) 172.39,158.466 175.324,161.4 181.004,161.4 181.25,161.646 181.25,161.997 181.458,162.204 181.668,162.204 181.672,162.2 183.956,162.2 183.964,162.208 184.171,162.208 184.455,162.492 184.455,162.992 v1(184.912,163.449)
FPGA.BUS3: FPGA.N11 SCU_FPGA_H_B.8 | length 61.9
  Top Layer w0.1: FPGA.N11@184.5,163.05 v1(184.9,162.65)
  Mid-Layer 1 w0.1: SCU_FPGA_H_B.8@138.46,160.62 137.541,159.701 137.541,154.838 137.744,154.635 151.155,154.635 151.428,154.908 171.013,154.908 171.216,154.704 175.194,154.704 176.056,155.566 184.497,155.566 v1(185.115,156.185)
  Mid-Layer 2 w0.1: v1(184.9,162.65) 184.912,162.638 184.912,162.345 185.318,161.938 185.318,156.388 v1(185.115,156.185)
FPGA.BUS4: FPGA.R11 SCU_FPGA_H_B.10 | length 48.5
  Top Layer w0.1: FPGA.R11@184.5,161.45 184.787,161.163 184.887,161.163 184.875,161.175 184.75,161.175 184.749,161.161 184.752,161.158 v1(184.784,161.158)
  Mid-Layer 1 w0.1: SCU_FPGA_H_B.10@138.46,163.16 139.822,161.798 168.38,161.798 168.561,161.617 174.33,161.617 175.267,160.68 184.404,160.68 184.887,161.163 184.875,161.175 184.75,161.175 184.749,161.161 184.752,161.158 v1(184.784,161.158)
FPGA.BUS5: FPGA.T12 SCU_FPGA_H_B.12 | length 62.4
  Top Layer w0.1: FPGA.T12@185.3,160.65 v1(185.699,160.251)
  Mid-Layer 1 w0.1: SCU_FPGA_H_B.12@138.46,165.7 137.541,164.781 137.541,162.154 138.158,161.537 168.361,161.417 169.651,161.417 173.333,157.735 173.333,155.651 173.68,155.304 174.915,155.304 175.58,155.969 178.19,155.969 179.135,156.914 185.318,156.795 v1(186.131,156.795)
  Bottom Layer w0.1: v1(185.699,160.251) 186.057,159.893 186.198,159.893 186.205,159.9 186.366,159.9 186.367,159.899 186.571,159.899 186.759,159.711 186.759,159.245 186.569,159.055 186.334,159.055 186.131,158.852 v1(186.131,156.795)
FPGA.BUS6: FPGA.V12 SCU_FPGA_H_B.14 | length 54.3
  Top Layer w0.1: FPGA.V12@185.3,159.05 185.699,158.651 v1(185.699,158.648)
  Mid-Layer 4 w0.1: SCU_FPGA_H_B.14@138.46,168.24 139.847,166.853 146.152,166.853 154.991,158.013 171.628,158.013 172.489,157.152 174.719,157.152 176.291,155.581 179.013,155.581 180.04,156.608 183.659,156.608 v1(185.699,158.648)
FPGA.BUS7: FPGA.N10 SCU_FPGA_H_B.16 | length 51.4
  Top Layer w0.1: v1(183.3,162.65) FPGA.N10@183.7,163.05
  Mid-Layer 1 w0.1: v1(150.063,164.059) 151.942,162.18 168.415,162.18 168.561,162.326 171.749,162.326 172.319,162.896 175.94,162.896 176.555,162.281 176.555,161.62 176.775,161.4 179.663,161.4 v1(180.111,161.849)
  Mid-Layer 4 w0.1: SCU_FPGA_H_B.16@138.46,170.78 139.365,169.875 144.247,169.875 v1(150.063,164.059)
  Bottom Layer w0.1: v1(180.111,161.849) 180.251,161.849 180.661,162.259 183.571,162.259 ; v1(183.3,162.65) 183.3,162.525 183.55,162.275
FPGA.BUS8: FPGA.P11 SCU_FPGA_H_B.18 | length 57.7
  Top Layer w0.1: FPGA.P11@184.5,162.25 184.901,161.849 v1(184.912,161.849)
  Mid-Layer 4 w0.1: SCU_FPGA_H_B.18@138.46,173.32 140.051,171.729 145.186,171.729 148.184,168.732 157.378,168.732 167.408,158.703 172.829,158.703 173.98,157.552 174.994,157.552 175.463,157.083 175.755,157.083 176.317,156.52 178.455,156.52 178.861,156.927 181.793,156.927 v1(183.312,158.445)
  Bottom Layer w0.1: v1(183.312,158.445) 183.35,158.483 183.35,159.592 183.346,159.596 183.346,159.99 183.954,160.599 184.244,160.599 184.45,160.805 184.456,160.799 184.995,160.799 185.134,160.938 185.134,161.436 184.95,161.62
FPGA.BUS9: FPGA.M10 SCU_FPGA_H_B.20 | length 52.3
  Top Layer w0.1: FPGA.M10@183.7,163.85 183.987,163.563 183.987,163.449 184.013,163.475 184.05,163.475 184,163.525 184,163.53 184.003,163.533 v1(184.009,163.533)
  Mid-Layer 1 w0.1: SCU_FPGA_H_B.20@138.46,175.86 139.365,174.955 v1(160.452,174.955)
  Mid-Layer 4 w0.1: v1(160.452,174.955) 170.907,164.5 174.835,164.5 174.905,164.57 175.361,164.57 175.431,164.5 175.841,164.5 175.928,164.586 176.218,164.586 176.304,164.5 176.654,164.5 176.766,164.612 177.056,164.612 177.168,164.5 177.455,164.5 177.555,164.6 177.845,164.6 177.945,164.5 178.255,164.5 178.355,164.6 178.645,164.6 178.745,164.5 179.345,164.5 179.539,164.694 181.051,164.694 181.254,164.49 181.254,164.084 181.458,163.881 182.956,163.881 183.388,163.449 184.024,163.449 184.05,163.475 184,163.525 184,163.53 184.003,163.533 v1(184.009,163.533)
FPGA.BUS10: FPGA.N9 SCU_FPGA_H_B.22 | length 60.7
  Top Layer w0.1: v1(182.512,162.662) FPGA.N9@182.9,163.05
  Mid-Layer 1 w0.1: SCU_FPGA_H_B.22@138.46,178.4 139.365,177.495 158.035,177.495 159.127,178.587 v1(179.852,178.587)
  Mid-Layer 2 w0.1: v1(179.852,178.587) 179.852,174.371 179.73,174.25 179.73,170.4 181.307,168.824 181.307,166.038 182.15,165.195 182.15,164.905 182.375,164.68 182.375,164.62 182.15,164.395 182.15,164.1 182.375,163.875 182.75,163.875 182.975,163.65 182.975,163.275 183.05,163.2 v1(182.512,162.662)
FPGA.BUS11: FPGA.U11 SCU_FPGA_H_B.24 | length 66.1
  Top Layer w0.1: FPGA.U11@184.5,159.85 184.889,159.461 184.912,159.461 184.898,159.475 184.875,159.475 v1(184.9,159.45)
  Mid-Layer 1 w0.1: SCU_FPGA_H_B.24@138.46,180.94 139.365,180.035 177.394,180.035 v1(178.537,181.178)
  Mid-Layer 2 w0.1: v1(178.537,181.178) 180.924,178.791 180.924,176.022 182.956,173.99 182.956,168.401 182.95,168.395 182.95,166.986 184.531,165.405 184.531,164.431 184.559,164.403 184.559,164.113 184.531,164.085 184.531,161.451 184.375,161.295 184.375,160.88 184.531,160.724 184.531,159.842 184.898,159.475 184.875,159.475 v1(184.9,159.45)
FPGA.BUS12: FPGA.V11 SCU_FPGA_H_B.26 | length 59.4
  Top Layer w0.1: FPGA.V11@184.5,159.05 184.709,159.05 184.912,158.847 184.912,158.662 v1(184.9,158.65)
  Mid-Layer 4 w0.1: SCU_FPGA_H_B.26@138.46,183.48 139.384,184.404 145.567,184.404 165.566,164.405 166.006,164.405 168.351,162.06 168.351,161.407 170.216,159.543 173.676,159.543 174.33,158.889 176.045,158.889 176.434,158.5 179.148,158.5 179.558,158.09 180.055,158.09 180.614,158.648 183.007,158.648 183.363,159.004 184.633,159.004 184.912,158.725 184.9,158.713 v1(184.9,158.65)
FPGA.BUS13: FPGA.M8 SCU_FPGA_H_B.28 | length 66.2
  Top Layer w0.1: v1(181.712,163.449) 181.94,163.678 182.1,163.678 FPGA.M8@182.1,163.85
  Mid-Layer 1 w0.1: SCU_FPGA_H_B.28@138.46,186.02 140.081,184.399 140.081,183.109 140.614,182.575 142.875,182.575 144.17,183.871 v1(178.511,183.871)
  Mid-Layer 2 w0.1: v1(178.511,183.871) 178.156,183.515 178.156,173.812 178.125,173.782 178.125,170.49 178.41,170.205 179.535,170.205 180.534,169.206 180.534,165.917 181.25,165.202 181.25,163.982 181.712,163.521 v1(181.712,163.449)
FPGA.BUS14: FPGA.N8 SCU_FPGA_H_B.30 | length 55.1
  Top Layer w0.1: v1(181.809,162.758) 181.809,162.754 181.805,162.75 181.725,162.75 181.712,162.763 181.813,162.763 FPGA.N8@182.1,163.05
  Mid-Layer 4 w0.1: SCU_FPGA_H_B.30@138.46,188.56 139.619,187.401 145.21,187.401 168.756,163.855 171.739,163.855 172.184,164.3 174.918,164.3 174.988,164.37 175.278,164.37 175.793,163.855 180.619,163.855 181.725,162.75 v1@181.808,162.75 ; v1@181.809,162.75 v1(181.809,162.758)
FPGA.BUS15: FPGA.U8 SCU_FPGA_H_B.32 | length 61.4
  Top Layer w0.1: v1(181.7,159.45) FPGA.U8@182.1,159.85
  Mid-Layer 4 w0.1: SCU_FPGA_H_B.32@138.46,191.1 137.36,190 137.36,187.531 137.947,186.944 144.843,186.944 166.745,165.042 166.745,164.42 168.77,162.396 169.34,162.396 171.793,159.943 174.129,159.943 174.783,159.289 176.22,159.289 176.609,158.9 181.15,158.9 v1(181.7,159.45)
FPGA.ENABLE: SCU_FPGA_H_B.36
FPGA.LBUB: FPGA.A11 SCU_FPGA_H_A.40 | length 64.6
  Top Layer w0.1: v1(183.555,174.802) 184.5,173.856 FPGA.A11@184.5,172.65
  Mid-Layer 4 w0.1: SCU_FPGA_H_A.40@132.46,201.26 133.72,200 157.413,200 182.61,174.802 v1(183.555,174.802)
FPGA.PROCEN: FPGA.N7 SCU_FPGA_H_C.2 | length 51.5
  Top Layer w0.1: v1(180.899,162.662) 180.912,162.662 FPGA.N7@181.3,163.05
  Mid-Layer 3 w0.1: SCU_FPGA_H_C.2@144.46,153 147.371,150.089 157.074,150.089 161.29,154.305 164.389,154.305 174.828,164.744 176.555,164.744 176.65,164.65 179.495,164.65 179.539,164.694 183.49,164.694 183.693,164.49 183.693,163.906 182.88,163.093 182.448,163.093 182.162,162.807 182.162,162.517 182.045,162.4 181.755,162.4 181.747,162.408 181.153,162.408 v1(180.899,162.662)
FPGA.STATE0: FPGA.U7 SCU_FPGA_H_B.38 | length 64.2
  Top Layer w0.1: v1(180.899,159.461) 180.911,159.461 FPGA.U7@181.3,159.85
  Mid-Layer 2 w0.1: SCU_FPGA_H_B.38@138.46,198.72 139.409,199.669 141.507,199.669 149.18,191.996 149.18,191.294 167.869,172.604 168.343,172.604 172.72,168.227 v1(172.72,163.652)
  Mid-Layer 4 w0.1: v1(172.72,163.652) 172.72,162.298 174.608,160.411 175.403,160.411 176.713,159.1 180.538,159.1 v1(180.899,159.461)
FPGA.STATE1: FPGA.V7 SCU_FPGA_H_B.40 | length 76.5
  Top Layer w0.1: SCU_FPGA_H_B.40@138.46,201.26 139.725,199.995 v1(139.725,176.936) ; v1(180.899,158.242) 180.899,158.649 FPGA.V7@181.3,159.05
  Mid-Layer 4 w0.1: v1(139.725,176.936) 139.725,175.285 140.411,174.6 152.197,174.6 167.854,158.943 173.034,158.943 174.224,157.752 175.198,157.752 175.666,157.284 179.94,157.284 v1(180.899,158.242)
FPGA.WRITE: FPGA.P8 SCU_FPGA_H_B.34 | length 59.2
  Top Layer w0.1: v1(181.712,161.849) 181.712,161.862 FPGA.P8@182.1,162.25
  Mid-Layer 2 w0.1: v1(176.022,166.751) 176.498,166.275 177.85,166.275 179,165.125 179,164.855 179.238,164.617 179.238,163.883 178.949,163.594 178.949,163.304 179.241,163.012 179.444,163.012 179.75,162.705 179.75,162.505 179.955,162.3 180.245,162.3 180.378,162.433 180.518,162.433 180.753,162.198 ; 180.754,162.199 181.044,162.199 181.468,161.775 181.638,161.775 v1(181.712,161.849)
  Mid-Layer 4 w0.1: SCU_FPGA_H_B.34@138.46,193.64 140.034,192.066 150.453,192.066 173.482,169.037 v1(174.777,169.037)
  Bottom Layer w0.1: v1(174.777,169.037) 174.777,167.996 v1(176.022,166.751)